# Altium PCB CTS.PcbDoc
Units mil, origin at the board's own origin, x right, y up, seen from the top; angles counter-clockwise.
Board outline 5100 x 4000 mil, 2 copper layers (Top Layer, Bottom Layer), stack 60.433 mil thick; 50 components, 39 nets, 166 pads, 93 vias.
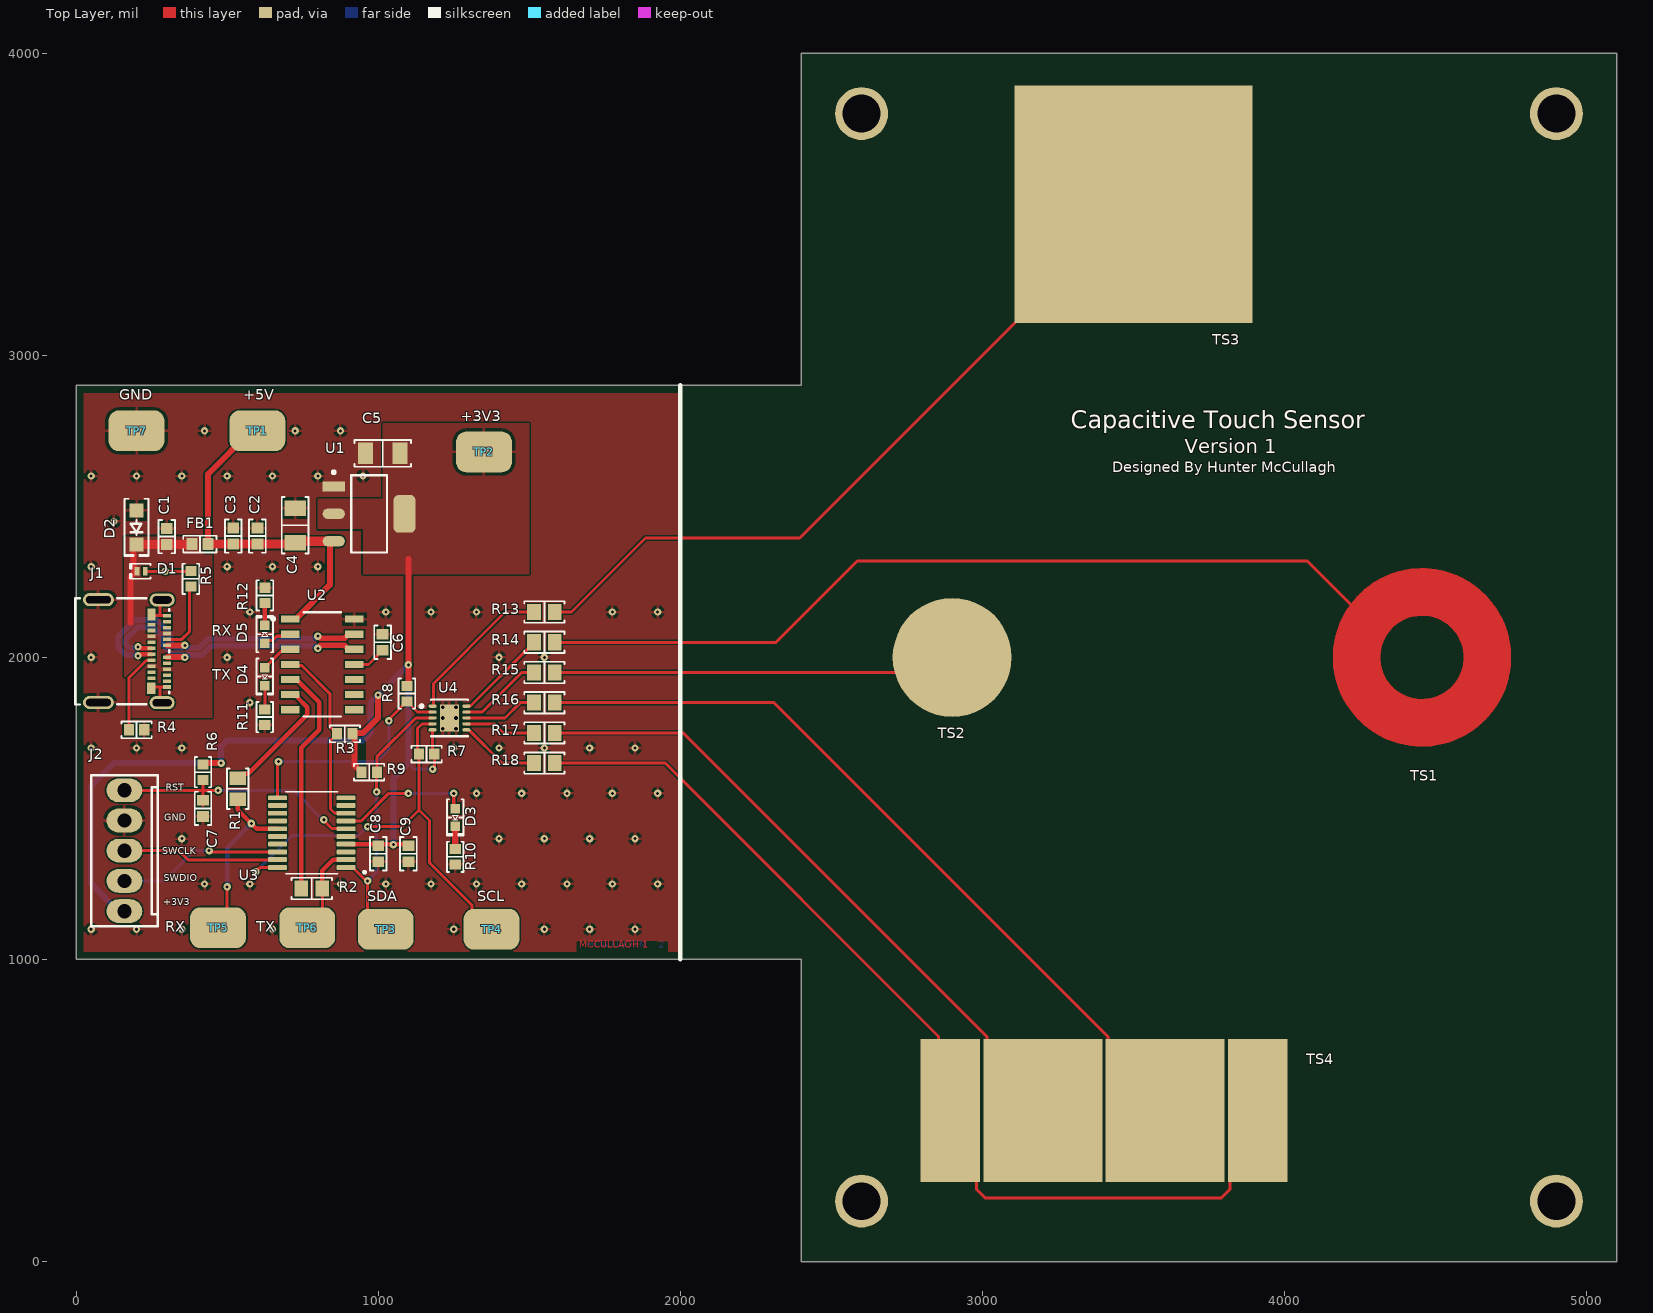
[diagram p0: Top Layer view]
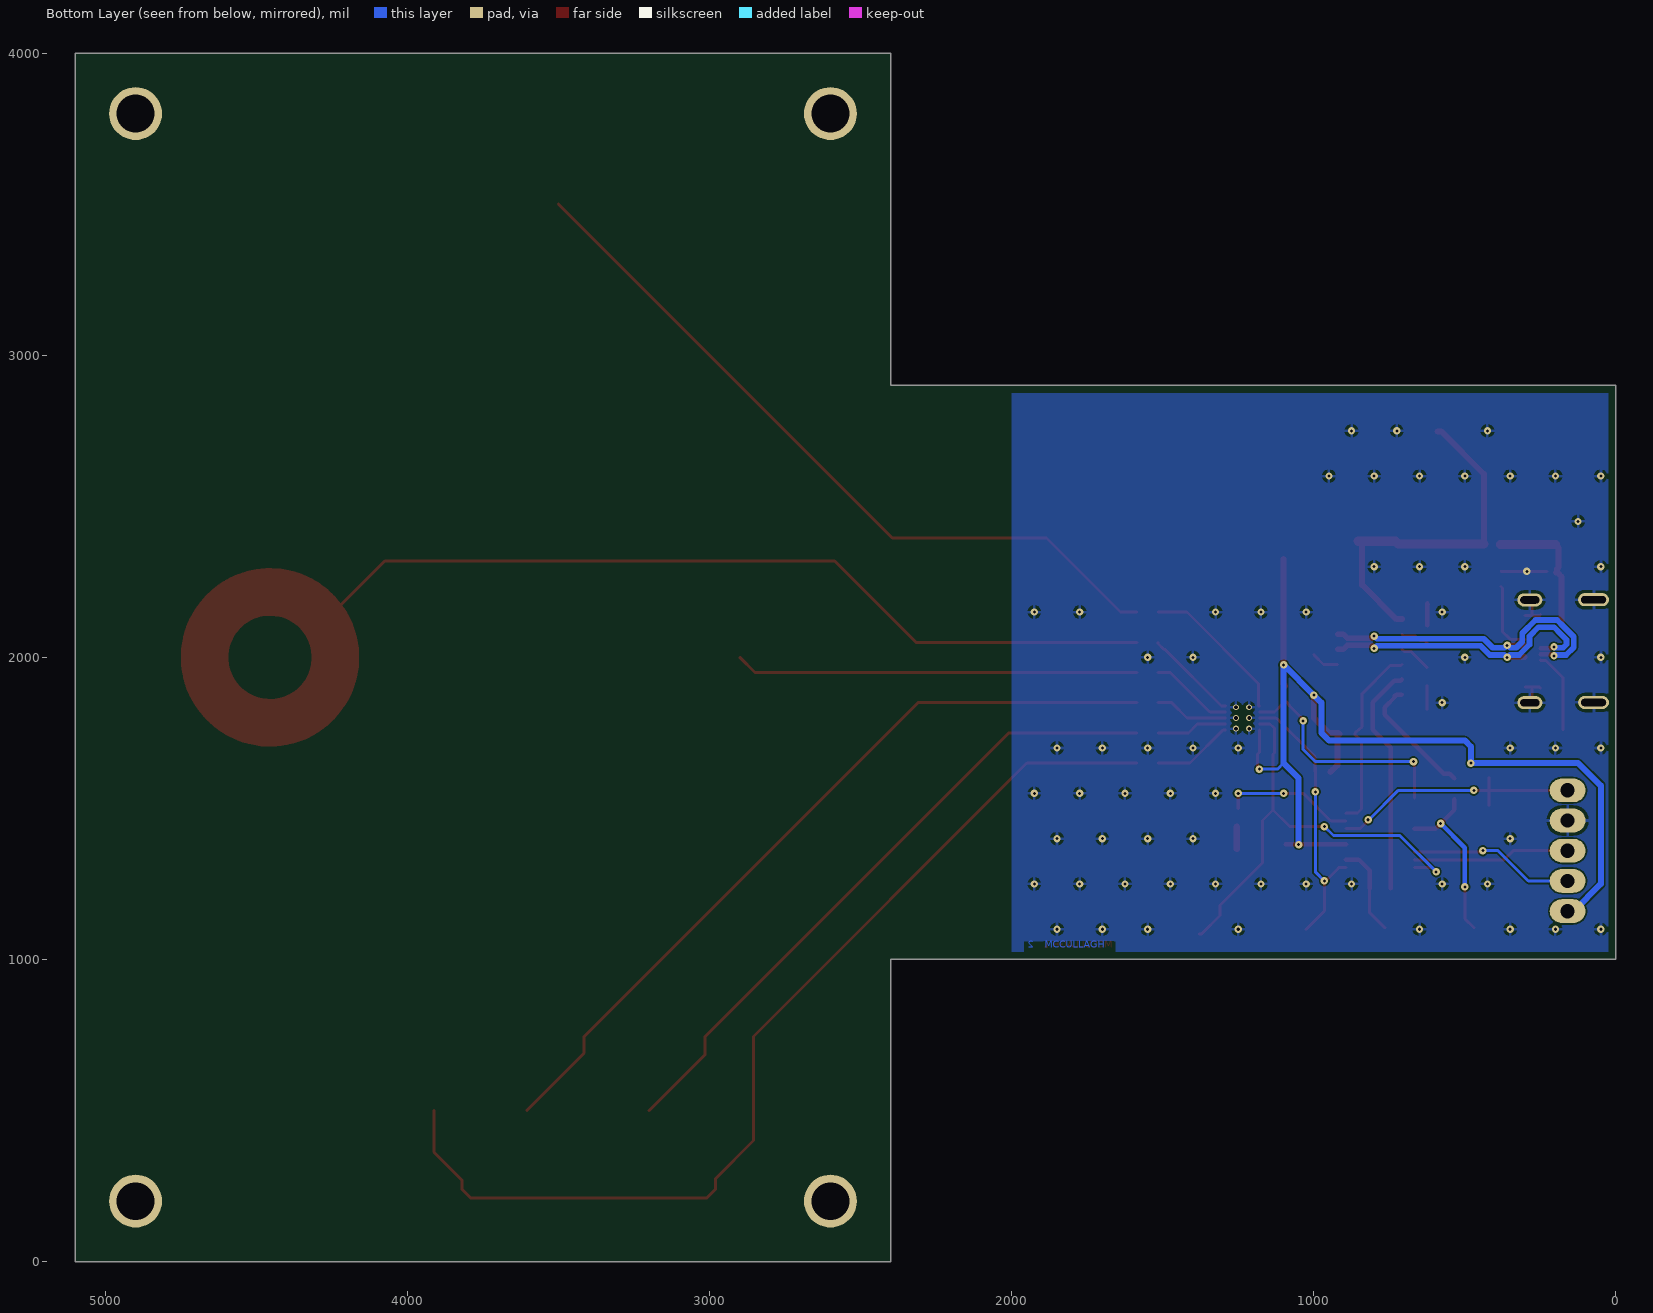
[diagram p1: Bottom Layer view, seen from below]
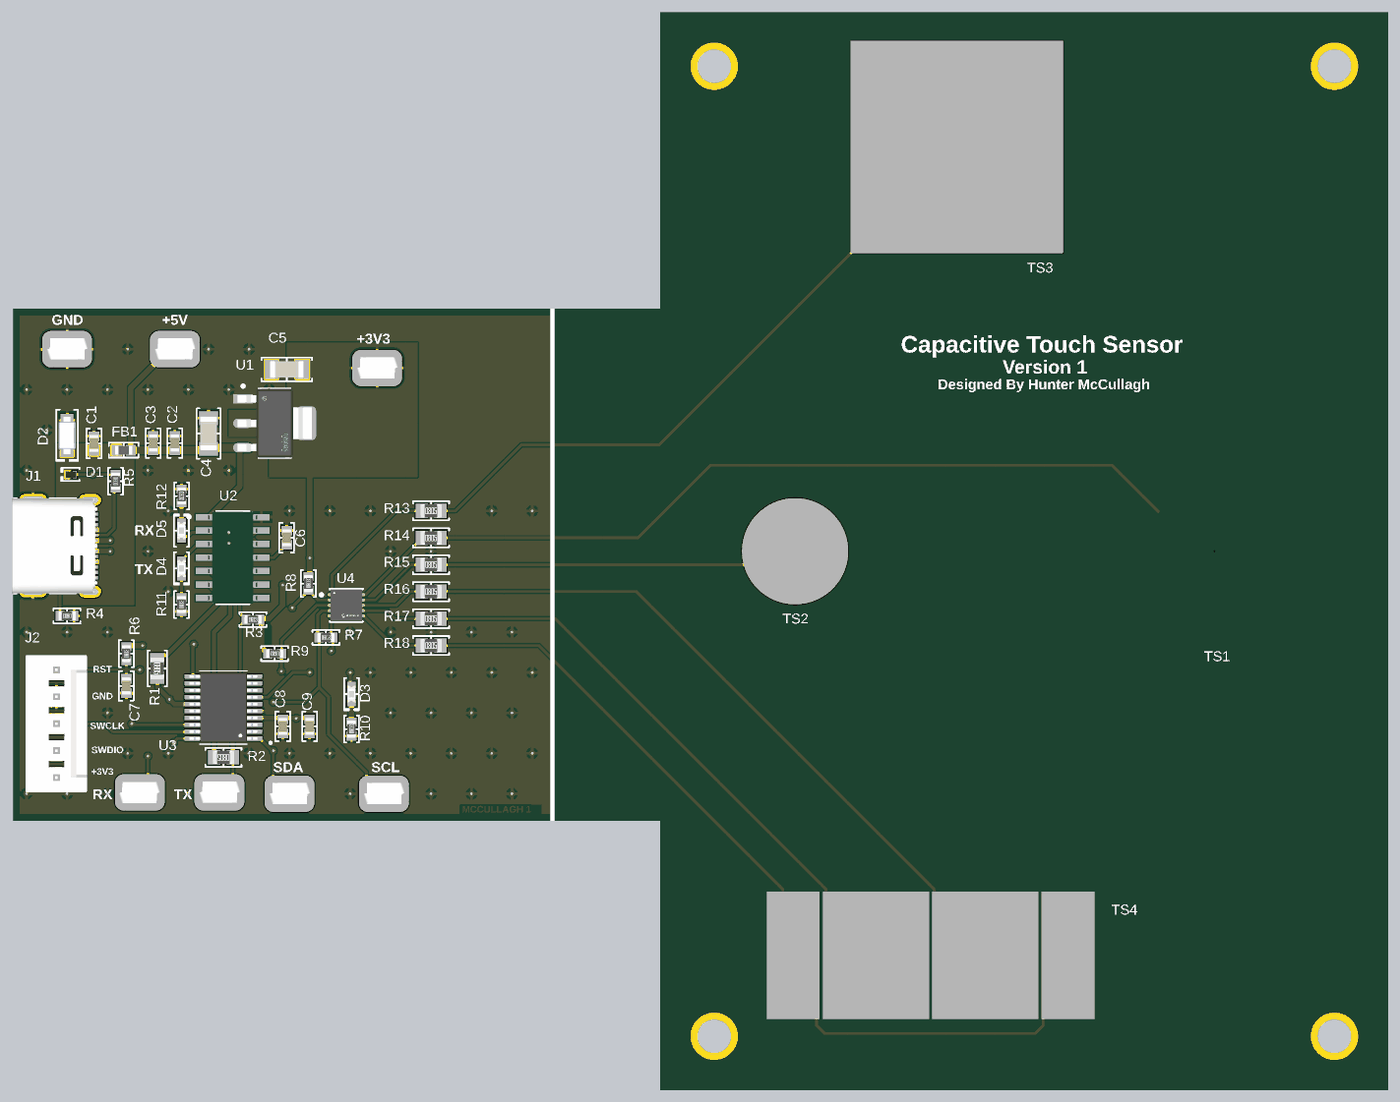
[diagram p2: 3D render of the assembled board from above, using the file's embedded part models]

## Layer stack, top to bottom
Top Solder: solder mask 0.4, Solder Resist, Dk 3.5
Top Layer: signal copper 0.689
Dielectric 1: prepreg 59.055, FR-4, Dk 4.8
Bottom Layer: signal copper 0.689
Board Layer Stack Bottom Solder: solder mask 0.4, Solder Resist, Dk 3.5

## Board outline
0,1000 0,2900 2400,2900 2400,4000 5100,4000 5100,0 2400,0 2400,1000

## Design rules (kind name [scope] priority, off if disabled: settings)
Clearance [All] p1: gap=5 ignorepadtopadclearanceinfootprint=FALSE
DiffPairsRouting "Schematic Differential Pairs Routing_3" [InNet('d_p')] p1: maxlimit=5 minlimit=5 mostfreqgap=5 toplayer_minwidth=18.8 toplayer_maxwidth=18.8 toplayer_prefwidth=18.8 bottomlayer_minwidth=18.8 bottomlayer_maxwidth=18.8 bottomlayer_prefwidth=18.8 impedanceprofiledriven=TRUE impedanceprofileid={8F36BA3C-3174-417B-8D45-3B1AD9F81AAA} impedanceprofilevalue=90.000000 maxuncoupledlength=500
DiffPairsRouting "Schematic Differential Pairs Routing_2" [InNet('d_n')] p2: maxlimit=5 minlimit=5 mostfreqgap=5 toplayer_minwidth=18.8 toplayer_maxwidth=18.8 toplayer_prefwidth=18.8 bottomlayer_minwidth=18.8 bottomlayer_maxwidth=18.8 bottomlayer_prefwidth=18.8 impedanceprofiledriven=TRUE impedanceprofileid={8F36BA3C-3174-417B-8D45-3B1AD9F81AAA} impedanceprofilevalue=90.000000 maxuncoupledlength=500
DiffPairsRouting [All] p3: maxlimit=10 minlimit=10 mostfreqgap=10 toplayer_minwidth=15 toplayer_maxwidth=15 toplayer_prefwidth=15 bottomlayer_minwidth=15 bottomlayer_maxwidth=15 bottomlayer_prefwidth=15 maxuncoupledlength=500
HoleSize [All] p1: absolutevalues=TRUE maxlimit=1000 minlimit=1 maxpercent=80.000 minpercent=20.000
MinimumSolderMaskSliver [All] p1: minsoldermaskwidth=1
PolygonConnect PolygonConnect_1 [All vs InNet('+VUSB')] p1: connectstyle=Direct reliefconductorwidth=10 reliefentries=4 polygonreliefangle="90 Angle" airgapwidth=10
PolygonConnect [All] p2: connectstyle=Relief reliefconductorwidth=10 reliefentries=4 polygonreliefangle="90 Angle" airgapwidth=10
RoutingVias [All] p1: holewidth=28 width=50 viastyle="Through Hole" minholewidth=28 minwidth=50 maxholewidth=28 maxwidth=50
SilkToSilkClearance [All] p1: silktosilkclearance=1
SilkToSolderMaskClearance [IsPad] p1: minsilkscreentomaskgap=1 clearancetoexposedcopper=TRUE
SolderMaskExpansion [All] p1: expansion=4 istentingtop=FALSE
SupplyNets "Schematic Supply Nets_3" [InNet('GND')] p1: voltage=0.000
SupplyNets "Schematic Supply Nets_2" [InNet('+5V')] p2: voltage=0.000
SupplyNets "Schematic Supply Nets_1" [InNet('+VUSB')] p3: voltage=0.000
SupplyNets "Schematic Supply Nets" [InNet('+3V3')] p4: voltage=0.000
Width [All] p1: maxlimit=120 minlimit=5 preferedwidth=10
25 further rules are at their usual default settings.

## Classes and differential pairs
differential pair d: +d_p -d_n

## Components (designator, comment, footprint, x,y, rotation, side; value= is the part's Value field where it differs from the comment)
C1 "0.1 µF" "CAP 0603_1608" 300,2400 r270 top
C2 "0.1 µF" "CAP 0603_1608" 600,2401.57 r270 top
C3 "1µF" "CAP 0603_1608" 520,2401.57 r270 top
C4 "10 µF" "CAP 1206_3216 - 0.8MM" 725,2437.09 r270 top
C5 "22 µF" "CAP 1206_3216 - 0.8MM" 1015,2675 r0 top
C6 "0.47 µF" "CAP 0603_1608" 1014.52,2050.13 r270 top
C7 "0.1 µF" "CAP 0603_1608" 420,1500 r90 top
C8 "0.1 µF" "CAP 0603_1608" 1000,1350 r90 top
C9 "1µF" "CAP 0603_1608" 1100,1350 r90 top
D1 "TPD1E05U06DPYT" 0402 215,2285 r180 top
D2 "DSS12UTR" SOD123F 200,2430 r270 top
D3 "Green" "LED 0603_1608 GREEN" 1255,1470 r270 top
D4 "Green" "LED 0603_1608 GREEN" 624.52,1936.23 r270 top
D5 "Green" "LED 0603_1608 GREEN" 624.52,2076.7 r90 top
FB1 "120 Ohms @ 100 MHz" "FER 0603_1608" 410,2375 r0 top
J1 "1054500101" "Molex 1054500101" 275,2020 r270 top
J2 "0022272051" "MOLEX KK 0022272051" 160,1360 r90 top
R1 "0Ω" "RES 0805_2012" 535,1565 r270 top value="0 Ohms"
R2 "0Ω" "RES 0805_2012" 780,1235 r180 top value="0 Ohms"
R3 "10kΩ" "RES 0603_1608" 889.52,1746.7 r0 top value="10 kOhms"
R4 "5.1kΩ" "RES 0603_1608" 200,1760 r180 top value="5.1 Ohms"
R5 "5.1kΩ" "RES 0603_1608" 380,2260 r270 top value="5.1 Ohms"
R6 "10kΩ" "RES 0603_1608" 420,1620 r90 top value="10 kOhms"
R7 "10kΩ" "RES 0603_1608" 1160,1680 r0 top value="10 kOhms"
R8 "10kΩ" "RES 0603_1608" 1095,1880 r90 top value="10 kOhms"
R9 "10kΩ" "RES 0603_1608" 970,1620 r180 top value="10 kOhms"
R10 "1kΩ" "RES 0603_1608" 1255,1340 r90 top value="1 kOhms"
R11 "1kΩ" "RES 0603_1608" 624.52,1802.29 r90 top value="1 kOhms"
R12 "1kΩ" "RES 0603_1608" 625,2205 r270 top value="1 kOhms"
R13 "0Ω" "RES 0805_2012" 1550,2150 r0 top value="0 Ohms"
R14 "0Ω" "RES 0805_2012" 1550,2050 r0 top value="0 Ohms"
R15 "0Ω" "RES 0805_2012" 1550,1950 r0 top value="0 Ohms"
R16 "0Ω" "RES 0805_2012" 1550,1850 r0 top value="0 Ohms"
R17 "0Ω" "RES 0805_2012" 1550,1750 r0 top value="0 Ohms"
R18 "0Ω" "RES 0805_2012" 1550,1650 r0 top value="0 Ohms"
TP1 "Test Point" Compact 600,2750 r0 top
TP2 "Test Point" Compact 1350,2680 r0 top
TP3 "Test Point" Compact 1025,1100 r0 top
TP4 "Test Point" Compact 1375,1100 r0 top
TP5 "Test Point" Compact 470,1105 r180 top
TP6 "Test Point" Compact 765,1105 r0 top
TP7 "Test Point" Compact 200,2750 r0 top
TS1 "Donut Touch Sensor" "DONUT TOUCH SENSOR" 4455,2000 r180 top
TS2 "Circle Touch Sensor" "CIRCLE TOUCH SENSOR" 2900,2000 r180 top
TS3 "Square Button" "Square Touch Sensor" 3500,3500 r180 top
TS4 "Q Slide Touch Sensor (3 Channel)" "Q TOUCH SLIDE SENSOR" 3215,500 r0 top
U1 "AZ1117IH-3.3TRG1" FP-SOT223-IPC_B 970,2475 r0 top
U2 "MCP2221A-I/SL" FP-C04-065-SL-MFG 814.52,1976.7 r0 top
U3 "STM32C011F4P6TR" SOP65P640X120-20N 780,1420 r180 top
U4 "CAP1206-1-AIA-TR" FP-10DFN-162304-3x3B-MFG 1235.91,1799.37 r0 top

## Footprints (in the part's own frame and the unit in brackets; to place one, negate y for a bottom-side part, rotate by r counter-clockwise, add the part's x,y. Pads: shape width x height; smd on the part's side, far side on the other; paste and mask are expansions set on the pad)
0402 [mm] "SODFL, 2-Leads, Body 0.675x1.075mm, IPC Medium Density"
  rect 0.4x0.7 smd: 1(-0.35,0) 2(0.35,0)
  silkscreen extent -0.8,-0.63 0.92,0.63, body extent -0.51,-0.31 0.5,0.3, height 0.45
"CAP 0603_1608" [mm] "Chip Capacitor, 2-Leads, Body 1.60x0.80mm, IPC Medium Density"
  rect 0.9x1 smd: 1(-0.675,0) 2(0.675,0)
  silkscreen extent -1.4,-0.7 1.4,0.7, body extent -0.8,-0.41 0.8,0.41, height 0.82
"CAP 1206_3216 - 0.8MM" [mm] "Chip Capacitor, 2-Leads, Body 3.25x1.60mm, IPC Medium Density"
  rect 1.3x1.8 smd: 1(-1.45,0) 2(1.45,0)
  silkscreen extent -2.37,-1.12 2.37,1.12, body extent -1.6,-0.8 1.6,0.8, height 0.8
"CIRCLE TOUCH SENSOR" [mm]
  round 10 smd: 1(0,0)
Compact [mil] "Surface Mount Test-Point"
  rrect50% 185x135 smd: 1(0,0)
  body extent -86,-73 88,75, height 91
"DONUT TOUCH SENSOR" [mil]
  round 0 smd: 1(0,0)
  Top Layer circle w157.48: c0,0 r216.54
"FER 0603_1608" [mm] "Chip Ferrite, 2-Leads, Body 1.60x0.80mm, IPC Medium Density"
  rect 0.9x1 smd: 1(-0.675,0) 2(0.675,0)
  silkscreen extent -1.4,-0.7 1.4,0.7, body extent -0.8,-0.41 0.8,0.41, height 0.82
FP-10DFN-162304-3x3B-MFG [mm]
  rrect100% 0.69x0.28 smd paste-1000 mask+0: 1(-1.42,1) 2(-1.42,0.5) 3(-1.42,0) 4(-1.42,-0.5) 5(-1.42,-1) 6(1.42,-1) 7(1.42,-0.5) 8(1.42,0) 9(1.42,0.5) 10(1.42,1)
  rect 1.6x2.3 smd paste-1000 mask+0: 11(0,0)
  silkscreen extent -2.47,-1.55 1.55,1.55, body extent -1.87,-1.65 1.87,1.65, height 0.25
FP-C04-065-SL-MFG [mm]
  rect 1.55x0.6 smd paste+0 mask+0: 1(-2.7,3.81) 2(-2.7,2.54) 3(-2.7,1.27) 4(-2.7,0) 5(-2.7,-1.27) 6(-2.7,-2.54) 7(-2.7,-3.81) 8(2.7,-3.81) 9(2.7,-2.54) 10(2.7,-1.27) 11(2.7,0) 12(2.7,1.27) 13(2.7,2.54) 14(2.7,3.81)
  silkscreen extent -4.25,-4.38 1.55,4.38, body extent -3.57,-4.62 3.57,4.62, height 0.25
FP-SOT223-IPC_B [mm]
  rect 1.86x0.872 smd paste+0 mask+0: 1(-2.976,2.3)
  rrect100% 1.86x0.872 smd paste+0 mask+0: 2(-2.976,0) 3(-2.976,-2.3)
  rrect47% 1.86x3.172 smd paste+0 mask+0: 4(2.976,0)
  silkscreen extent -3.1,-3.25 1.5,3.62, body extent -4.16,-3.5 4.16,3.5, height 0.25
"LED 0603_1608 GREEN" [mm] "Chip Diode, 2-Leads, Body 1.60x0.80mm, IPC Medium Density"
  rect 0.8x0.8 smd: 1(-0.75,0) 2(0.75,0)
  silkscreen extent -1.52,-0.7 1.52,0.7, body extent -0.8,-0.4 0.8,0.4, height 0.53
"Molex 1054500101" [mm] "USB-C Receptacle Connector 24 Position Surface Mount, 24 Position, Body 8.94x7.90mm"
  rect 0.3x0.7 smd: A1(-3,0.655) A2(-2.5,0.655) A3(-2,0.655) A4(-1.5,0.655) A5(-1,0.655) A6(-0.5,0.655) A7(0.5,0.655) A8(1,0.655) A9(1.5,0.655) A10(2,0.655) A11(2.5,0.655) A12(3,0.655) B2(2.25,-0.645) B3(1.75,-0.645) B4(1.25,-0.645) B5(0.75,-0.645) B6(0.25,-0.645) B7(-0.25,-0.645) B8(-0.75,-0.645) B9(-1.25,-0.645) B10(-1.75,-0.645) B11(-2.25,-0.645)
  rect 1x0.7 smd: B1(3.1,-0.655) B12(-3.1,-0.645)
  oval 1.1x2.6 hole 2.1 slot 0.6 at 0 deg: S(-4.34,-5.105) S(4.3,-5.105)
  oval 1.1x2.1 hole 1.6 slot 0.6 at 0 deg: S(-4.32,0.245) S(4.32,0.245)
  silkscreen extent -4.47,-7.07 4.47,0.83, body extent -4.47,-7.06 4.47,0.84, height 3.21
"MOLEX KK 0022272051" [mm]
  oval 2x3 hole 1.2: 1(-5.08,0) 2(-2.54,0) 3(0,0) 4(2.54,0) 5(5.08,0)
  silkscreen extent -6.35,-2.79 6.35,2.79, body extent -6.35,-2.9 6.35,2.9, height 11.7
"Q TOUCH SLIDE SENSOR" [mm]
  rect 5x12 smd mask+0.025: 1(-8.179,0) 1(17.704,0)
  rect 10x12 smd mask+0.025: 2(-0.381,0) 3(9.906,0)
"RES 0603_1608" [mm] "Chip Resistor, 2-Leads, Body 1.60x0.80mm, IPC Medium Density"
  rect 0.85x0.95 smd: 1(-0.65,0) 2(0.65,0)
  silkscreen extent -1.27,-0.7 1.27,0.7, body extent -0.8,-0.4 0.8,0.4, height 0.45
"RES 0805_2012" [mm] "Chip Resistor, 2-Leads, Body 2.00x1.25mm, IPC Medium Density"
  rect 1.15x1.35 smd: 1(-0.875,0) 2(0.875,0)
  silkscreen extent -1.7,-0.9 1.7,0.9, body extent -1,-0.62 1,0.63, height 0.6
SOD123F [mm] "SODFL, 2-Leads, Body 1.60x3.50mm, IPC Medium Density"
  rect 1.2x1.2 smd: 1(-1.43,0) 2(1.43,0)
  silkscreen extent -2.41,-1.02 2.41,1.02, body extent -1.75,-0.8 1.75,0.8, height 1.1
SOP65P640X120-20N [mm]
  rrect25% 1.56x0.41 smd: 1(-2.88,2.925) 2(-2.88,2.275) 3(-2.88,1.625) 4(-2.88,0.975) 5(-2.88,0.325) 6(-2.88,-0.325) 7(-2.88,-0.975) 8(-2.88,-1.625) 9(-2.88,-2.275) 10(-2.88,-2.925) 11(2.88,-2.925) 12(2.88,-2.275) 13(2.88,-1.625) 14(2.88,-0.975) 15(2.88,-0.325) 16(2.88,0.325) 17(2.88,0.975) 18(2.88,1.625) 19(2.88,2.275) 20(2.88,2.925)
  silkscreen extent -4.54,-3.45 2.2,3.45, body extent -3.2,-3.25 3.2,3.25, height 1.2
"Square Touch Sensor" [mm]
  rect 20x20 smd: 1(0,0)

## Part data
C1 C2 C7 C8: library part C0603C104K5RAC7411, "CAP CER 0.1UF 50V X7R 0603", Device Package="0603 (1608 Metric)", Manufacturer=KEMET, Operating Temperature="-55°C ~ 125°C", Supplier Part Number 1=399-C0603C104K5RAC7411CT-ND, Temperature Coefficient=X7R, Tolerance=±10%, Voltage - Rated=50V, Applications="Bypass, Decoupling", Capacitance="0.1 µF", ComponentLink1Description=Datasheet, ComponentLink1URL=https://api.kemet.com/component-edge/download/datasheet/C0603C104K5RAC7411.pdf, ComponentLink2Description="DigiKey Link", ComponentLink2URL=https://www.digikey.com/en/products/detail/kemet/C0603C104K5RAC7411/3317013, LastUpdated="2026-04-06 7:23:52 PM", Lifecycle Status=Active, Minimum Order=1, Mounting Type="Surface Mount, MLCC", Package / Case="0603 (1608 Metric)", Packaging=TapeAndReel, Part Number=C0603C104K5RAC7411, Part Status=Active, PartId=2233, Price=0.01, Series="SMD Comm X7R", Size / Dimension="0.063\" L x 0.031\" W (1.60mm x 0.80mm)", Supplier 1=DigiKey, Thickness (Max)="0.035\" (0.90mm)"
C3 C9: library part 06033D105MAT2A, "CAP CER 1UF 25V X5R 0603", Device Package="0603 (1608 Metric)", Manufacturer="AVX Corporation", Operating Temperature="-55°C ~ 85°C", Supplier Part Number 1=478-4531-1-ND, Temperature Coefficient=X5R, Tolerance=±20%, Voltage - Rated=25V, Applications="General Purpose", Capacitance=1µF, ComponentLink1Description=Datasheet, ComponentLink1URL=http://datasheets.avx.com/cx5r.pdf, ComponentLink2Description="DigiKey Link", ComponentLink2URL=http://digikey.com/product-detail/en/avx-corporation/06033D105MAT2A/478-4531-1-ND/1645882, LastUpdated="2020-09-02 1:03:35 AM", Lifecycle Status=Active, Minimum Order=1, Mounting Type="Surface Mount, MLCC", Package / Case="0603 (1608 Metric)", Packaging=TapeAndReel, Part Number=06033D105MAT2A, Part Status=Active, PartId=2656, Price=0.11, Series=-, Size / Dimension="0.063\" L x 0.032\" W (1.60mm x 0.81mm)", Supplier 1=DigiKey, Thickness (Max)="0.035\" (0.90mm)"
C4: library part GRM31CR71E106KA12K, "CAP CER 10UF 25V X7R 1206", Device Package="1206 (3216 Metric)", Manufacturer="Murata Electronics", Operating Temperature="-55°C ~ 125°C", Supplier Part Number 1=490-14678-1-ND, Temperature Coefficient=X7R, Tolerance=±10%, Voltage - Rated=25V, Applications="General Purpose", Capacitance="10 µF", ComponentLink1Description=Datasheet, ComponentLink1URL=https://search.murata.co.jp/Ceramy/image/img/A01X/G101/ENG/GRM31CR71E106KA12-01.pdf, ComponentLink2Description="DigiKey Link", ComponentLink2URL=https://www.digikey.com/en/products/detail/murata-electronics/GRM31CR71E106KA12K/4905618, LastUpdated="2026-04-06 7:38:01 PM", Lifecycle Status=Active, Minimum Order=1, Mounting Type="Surface Mount, MLCC", Package / Case="1206 (3216 Metric)", Packaging=TapeAndReel, Part Number=GRM31CR71E106KA12K, Part Status=Active, PartId=19493, Price=0.07, Series=GRM, Size / Dimension="0.126\" L x 0.063\" W (3.20mm x 1.60mm)", Supplier 1=DigiKey, Thickness (Max)="0.071\" (1.80mm)"
C5: library part CL31A226KOCLFNC, "CAP CER 22UF 16V X5R 1206", Device Package="1206 (3216 Metric)", Manufacturer="Samsung Electro-Mechanics", Operating Temperature="-55°C ~ 85°C", Supplier Part Number 1=1276-2725-1-ND, Temperature Coefficient=X5R, Tolerance=±10%, Voltage - Rated=16V, Applications="General Purpose", Capacitance="22 µF", ComponentLink1Description=Datasheet, ComponentLink1URL=http://www.samsungsem.com/kr/support/product-search/mlcc/CL31A226KOCLFNC.jsp, ComponentLink2Description="DigiKey Link", ComponentLink2URL=https://www.digikey.com/en/products/detail/samsung-electro-mechanics/CL31A226KOCLFNC/3888383, LastUpdated="2026-04-06 7:38:00 PM", Lifecycle Status=Active, Minimum Order=1, Mounting Type="Surface Mount, MLCC", Package / Case="1206 (3216 Metric)", Packaging=TapeAndReel, Part Number=CL31A226KOCLFNC, Part Status=Active, PartId=18940, Price=0.09, Series=CL, Size / Dimension="0.126\" L x 0.063\" W (3.20mm x 1.60mm)", Supplier 1=DigiKey, Thickness (Max)="0.037\" (0.95mm)"
C6: library part GMC10X7R474J25NT, "CAP0603 X7R .47UF 5% 25V", Device Package="0603 (1608 Metric)", Manufacturer="Cal-Chip Electronics, Inc.", Operating Temperature="-55°C ~ 125°C", Supplier Part Number 1=4713-GMC10X7R474J25NTCT-ND, Temperature Coefficient=X7R, Tolerance=±5%, Voltage - Rated=25V, Applications="General Purpose", Capacitance="0.47 µF", ComponentLink1Description=Datasheet, ComponentLink1URL=https://calchip.com/wp-content/uploads/2024/02/gmc_series-1.pdf, ComponentLink2Description="DigiKey Link", ComponentLink2URL=https://www.digikey.com/en/products/detail/cal-chip-electronics-inc/GMC10X7R474J25NT/25573329, LastUpdated="2026-04-06 7:17:50 PM", Lifecycle Status=Active, Minimum Order=1, Mounting Type="Surface Mount, MLCC", Package / Case="0603 (1608 Metric)", Packaging=TapeAndReel, Part Number=GMC10X7R474J25NT, PartId=65729, Price=0.02, Series=GMC, Size / Dimension="0.063\" L x 0.031\" W (1.60mm x 0.80mm)", Supplier 1=DigiKey, Thickness (Max)="0.037\" (0.95mm)"
D1: "TVS DIODE 5.5VWM 14VC 2X1SON", Current - Peak Pulse (10/1000µs)="2.5A (8/20µs)", Device Package="0402 (1005 Metric)", Manufacturer="Texas Instruments", Operating Temperature="-40°C ~ 125°C (TA)", Power - Peak Pulse=40W, Power Line Protection=Yes, Supplier Device Package="2-X1SON (1x.60)", Supplier Part Number 1=296-39342-1-ND, Voltage - Breakdown (Min)=6.5V, Voltage - Clamping (Max) @ Ipp=14V, Voltage - Reverse Standoff (Typ)="5.5V (Max)", Applications=HDMI, ComponentLink1Description=Datasheet, ComponentLink1URL=http://www.ti.com/general/docs/suppproductinfo.tsp?distId=10&gotoUrl=http%3A%2F%2Fwww.ti.com%2Flit%2Fgpn%2Ftpd1e05u06, ComponentLink2Description="DigiKey Link", ComponentLink2URL=https://www.digikey.com/en/products/detail/texas-instruments/TPD1E05U06DPYT/3902056, LastUpdated="2026-04-05 9:01:42 PM", Lifecycle Status=Active, Minimum Order=1, Mounting Type="Surface Mount", Package / Case="0402 (1005 Metric)", Packaging=TapeAndReel, Part Number=TPD1E05U06DPYT, Part Status=Active, PartId=10366, Price=0.32, Series=-, Supplier 1=DigiKey, Type=Zener, Unidirectional Channels=1
D2: "SCHOTTKY 20V SOD-123FL", Capacitance @ Vr, F="110pF @ 4V, 1MHz", Current - Average Rectified (Io)=1A, Current - Reverse Leakage @ Vr="100 µA @ 20 V", Manufacturer="SMC Diode Solutions", Operating Temperature - Junction="-55°C ~ 150°C", Package / Case=SOD-123F, Supplier Device Package=SOD-123FL, Supplier Part Number 1=1655-1925-1-ND, Voltage - DC Reverse (Vr) (Max)="20 V", Voltage - Forward (Vf) (Max) @ If="500 mV @ 1 A", ComponentLink1Description=Datasheet, ComponentLink1URL=http://www.smc-diodes.com/propdf/DSS12U%20THRU%20DSS125U%20N1873%20REV.A.pdf, ComponentLink2Description="DigiKey Link", ComponentLink2URL=https://www.digikey.com/en/products/detail/smc-diode-solutions/DSS12UTR/8341857, Diode Type=Schottky, LastUpdated="2026-04-05 8:31:53 PM", Lifecycle Status=Active, Minimum Order=1, Mounting Type="Surface Mount", Packaging=TapeAndReel, Part Number=DSS12UTR, Part Status=Active, PartId=2514, Price=0.03, Series=-, Speed="Fast Recovery =< 500ns, > 200mA (Io)", Supplier 1=DigiKey
D3 D4 D5: library part VLMTG1400-GS08, "LED GREEN 0603 SMD", Current - Test=20mA, Device Package="0603 (1608 Metric)", Lens Color=0.65mm, Manufacturer="Vishay Semiconductor Opto Division", Millicandela Rating=1400mcd, Supplier Device Package=0603, Supplier Part Number 1=VLMTG1400-GS08CT-ND, Voltage - Forward (Vf) (Typ)=2.85V, Color=Green, ComponentLink1Description=Datasheet, ComponentLink1URL=http://www.vishay.com/docs/84393/vlmtg1400.pdf, ComponentLink2Description="DigiKey Link", ComponentLink2URL=https://www.digikey.com/en/products/detail/vishay-semiconductor-opto-division/VLMTG1400-GS08/7597661, Configuration=Standard, Height (Max)=0.65mm, LastUpdated="2026-04-05 8:36:38 PM", Lens Size="1.10mm x 0.80mm", Lens Style="Rectangle with Flat Top", Lifecycle Status=Active, Minimum Order=1, Mounting Type="Surface Mount", Package / Case="0603 (1608 Metric)", Packaging=TapeAndReel, Part Number=VLMTG1400-GS08, Part Status=Active, PartId=606, Price=0.10, Series=CHIPLED, Size / Dimension="1.60mm L x 0.80mm W", Supplier 1=DigiKey, Viewing Angle=146°, Wavelength - Dominant=525nm, Wavelength - Peak=518nm
FB1: library part BLM18BD121BH1D, "FERRITE BEAD 120 OHM 0603 1LN", Current Rating (Max)=300mA, DC Resistance (DCR) (Max)=400mOhm, Device Package="0603 (1608 Metric)", Manufacturer="Murata Electronics", Operating Temperature="-55°C ~ 150°C", Ratings=AEC-Q200, Supplier Part Number 1=490-14041-1-ND, ComponentLink1Description=Datasheet, ComponentLink1URL=https://www.murata.com/en-us/products/productdata/8798137286686/QNFA9129.pdf, ComponentLink2Description="DigiKey Link", ComponentLink2URL=https://www.digikey.com/en/products/detail/murata-electronics/BLM18BD121BH1D/6156012, Filter Type="Power Line", Height (Max)="0.037\" (0.95mm)", Impedance @ Frequency="120 Ohms @ 100 MHz", LastUpdated="2026-04-05 8:28:12 PM", Lifecycle Status=Active, Minimum Order=1, Mounting Type="Surface Mount", Number of Lines=1, Package / Case="0603 (1608 Metric)", Packaging=TapeAndReel, Part Number=BLM18BD121BH1D, Part Status=Active, PartId=562, Price=0.03, Series="EMIFIL®, BLM18", Size / Dimension="0.063\" L x 0.031\" W (1.60mm x 0.80mm)", Supplier 1=DigiKey
J1: "CONN RCP USB3.1 TYPEC 24P SMD RA", Current Rating (Amps)="0.25A, 1A, 5A", Manufacturer=Molex, Operating Temperature="-30°C ~ 85°C", Supplier Part Number 1=WM12856CT-ND, Voltage - Rated=30VAC/DC, ComponentLink1Description=Datasheet, ComponentLink1URL=https://www.molex.com/pdm_docs/ps/PS-105448-001.pdf, ComponentLink2Description="DigiKey Link", ComponentLink2URL=http://digikey.com/product-detail/en/molex/1054500101/WM12856CT-ND/5843891, Connector Type="USB - C (Type - C)", Gender=Receptacle, LastUpdated="2020-06-06 2:14:04 AM", Lifecycle Status=Active, Mating Cycles=10000, Minimum Order=1, Mounting Feature=Horizontal, Mounting Type="Surface Mount, Right Angle; Through Hole", Number of Contacts=24, Number of Ports=1, Packaging=TapeAndReel, Part Number=1054500101, Part Status=Active, Price=1.22, Series=105445, Shielding=Shielded, Specifications="USB 3.1 (USB 3.1 Gen 2, Superspeed+)", Supplier 1=DigiKey, Termination=Solder
J2: "CONN HEADER VERT 5POS 2.54MM", Insulation Color=Natural, Manufacturer=Molex, Material Flammability Rating="UL94 V-0", Supplier Part Number 1=WM4114-ND, ComponentLink1Description=Datasheet, ComponentLink1URL=https://www.molex.com/pdm_docs/sd/022272051_sd.pdf, ComponentLink2Description="DigiKey Link", ComponentLink2URL=http://digikey.com/product-detail/en/molex/0022272051/WM4114-ND/1130580, Connector Type=Header, Contact Finish - Mating=Tin, Contact Finish - Post=Tin, Contact Finish Thickness - Mating="100.0µin (2.54µm)", Contact Length - Mating="0.295\" (7.49mm)", Contact Length - Post="0.140\" (3.56mm)", Contact Material=Brass, Contact Shape=Square, Contact Type="Male Pin", Fastening Type="Friction Lock", Insulation Height="0.461\" (11.70mm)", Insulation Material="Polyamide (PA), Nylon", LastUpdated="2020-01-12 11:52:16 PM", Lifecycle Status=Active, Minimum Order=1, Mounting Type="Through Hole", Number of Positions=5, Number of Positions Loaded=All, Number of Rows=1, Overall Contact Length="0.560\" (14.22mm)", Packaging=Bulk, Part Number=0022272051, Part Status=Active, PartId=79, Pitch - Mating="0.100\" (2.54mm)", Price=0.46, Series="KK 6410", Shrouding="Shrouded - 1 Wall", Style="Board to Cable/Wire", Supplier 1=DigiKey, Termination=Solder
R1 R2 R13 R14 R15 R16 R17 R18: library part TLRZ2ATTD, "RES 0 OHM JUMPER 0805", Device Package="0805 (2012 Metric)", Manufacturer="KOA Speer Electronics, Inc.", Operating Temperature="-65°C ~ 170°C", Ratings=AEC-Q200, Resistance="0 Ohms", Supplier Device Package=0805, Supplier Part Number 1=2019-TLRZ2ATTDCT-ND, Tolerance=Jumper, ComponentLink1Description=Datasheet, ComponentLink1URL=http://www.koaspeer.com/catimages/Products/TLRZ/TLRZ.pdf, ComponentLink2Description="DigiKey Link", ComponentLink2URL=https://www.digikey.com/en/products/detail/koa-speer-electronics-inc/TLRZ2ATTD/9845494, Composition="Metal Element", Features="Automotive AEC-Q200, Current Sense", Height - Seated (Max)="0.022\" (0.55mm)", LastUpdated="2026-04-05 8:11:26 PM", Lifecycle Status=Active, Minimum Order=1, Number of Terminations=2, Package / Case="0805 (2012 Metric)", Packaging=TapeAndReel, Part Number=TLRZ2ATTD, Part Status=Active, PartId=27685, Price=0.08, Series=TLRZ, Size / Dimension="0.079\" L x 0.049\" W (2.00mm x 1.25mm)", Supplier 1=DigiKey
R3 R6 R7 R8 R9: library part CPF0603B10KE, "RES SMD 10K OHM 0.1% 1/16W 0603", Device Package="0603 (1608 Metric)", Manufacturer="TE Connectivity Passive Product", Operating Temperature="-55°C ~ 155°C", Power (Watts)="0.063W, 1/16W", Resistance="10 kOhms", Supplier Device Package=0603, Supplier Part Number 1=A119886CT-ND, Temperature Coefficient=±25ppm/°C, Tolerance=±0.1%, ComponentLink1Description=Datasheet, ComponentLink1URL=https://www.te.com/commerce/DocumentDelivery/DDEController?Action=srchrtrv&DocNm=1773200&DocType=DS&DocLang=English, ComponentLink2Description="DigiKey Link", ComponentLink2URL=https://www.digikey.com/en/products/detail/te-connectivity-passive-product/CPF0603B10KE/2389826, Composition="Thin Film", Height - Seated (Max)="0.022\" (0.55mm)", LastUpdated="2024-02-09 8:43:37 PM", Lifecycle Status=Active, Minimum Order=1, Number of Terminations=2, Package / Case="0603 (1608 Metric)", Packaging=TapeAndReel, Part Number=CPF0603B10KE, Part Status=Active, PartId=4872, Price=0.09, Series="CPF, Neohm", Size / Dimension="0.061\" L x 0.031\" W (1.55mm x 0.80mm)", Supplier 1=DigiKey
R4 R5: library part RMCF0603FT5R10, "RES 5.1 OHM 1% 1/10W 0603", Device Package="0603 (1608 Metric)", Manufacturer="Stackpole Electronics Inc", Operating Temperature="-55°C ~ 155°C", Power (Watts)="0.1W, 1/10W", Ratings=AEC-Q200, Resistance="5.1 Ohms", Supplier Device Package=0603, Supplier Part Number 1=RMCF0603FT5R10CT-ND, Temperature Coefficient=±200ppm/°C, Tolerance=±1%, ComponentLink1Description=Datasheet, ComponentLink1URL=https://www.seielect.com/catalog/sei-rmcf_rmcp.pdf, ComponentLink2Description="DigiKey Link", ComponentLink2URL=https://www.digikey.com/en/products/detail/stackpole-electronics-inc/RMCF0603FT5R10/1761181, Composition="Thick Film", Features="Automotive AEC-Q200", Height - Seated (Max)="0.022\" (0.55mm)", LastUpdated="2024-02-09 8:43:31 PM", Lifecycle Status=Active, Minimum Order=1, Number of Terminations=2, Package / Case="0603 (1608 Metric)", Packaging=CutTape, Part Number=RMCF0603FT5R10, Part Status=Active, PartId=6203, Price=0.01, Series=RMCF, Size / Dimension="0.061\" L x 0.031\" W (1.55mm x 0.80mm)", Supplier 1=DigiKey
R10 R11 R12: library part CRCW06031K00FKEB, "RES SMD 1K OHM 1% 1/10W 0603", Device Package="0603 (1608 Metric)", Manufacturer="Vishay Dale", Operating Temperature="-55°C ~ 155°C", Power (Watts)="0.1W, 1/10W", Ratings=AEC-Q200, Resistance="1 kOhms", Supplier Device Package=0603, Supplier Part Number 1=541-2985-1-ND, Temperature Coefficient=±100ppm/°C, Tolerance=±1%, ComponentLink1Description=Datasheet, ComponentLink1URL=http://www.vishay.com/docs/20035/dcrcwe3.pdf, ComponentLink2Description="DigiKey Link", ComponentLink2URL=https://www.digikey.com/en/products/detail/vishay-dale/CRCW06031K00FKEB/5071169, Composition="Thick Film", Features="Automotive AEC-Q200", Height - Seated (Max)="0.020\" (0.50mm)", LastUpdated="2024-02-09 8:43:36 PM", Lifecycle Status=Active, Minimum Order=1, Number of Terminations=2, Package / Case="0603 (1608 Metric)", Packaging=CutTape, Part Number=CRCW06031K00FKEB, Part Status=Active, PartId=5123, Price=0.01, Series=CRCW, Size / Dimension="0.063\" L x 0.033\" W (1.60mm x 0.85mm)", Supplier 1=DigiKey
TP1 TP2 TP3 TP4 TP5 TP6 TP7: library part "TP SMT Compact", "Test-Point SMT Compact", Manufacturer Part #=5016, BTI Part #=113190062, Install/No Install=Install
TS1: library part donut_button
TS2: library part circle_button
TS3: library part square_button
TS4: library part q_touch_slider
U1: library part CMP-12756-000043-1, "IC REG LINEAR 3.3V 1A SOT223", Case/Package=TO-261-4, Dropout Voltage=1.2V, Max Operating Temperature=125°C, Min Current Limit=1A, Min Operating Temperature=-40°C, Output Current=800mA, Output Voltage=3.3V, Mount="Surface Mount", Number of Pins=3, Number of Regulators=1, Packaging="Tape and Reel", RoHS Compliant=Yes
U2: library part CMP-06284-000011-1, "IC USB TO I2C/UART 14SOIC", Ambient Temperature Range High=+85°C, Ambient Temperature Range Low=-40°C, Manufacturer=Microchip, Max Junction Temp=+150°C, Max Supply Voltage=5.5V, Min Supply Voltage=3V, Nominal Supply Current=10-13mA, Package=C04-065-SL, Temperature="-40°C to +85°C", Automotive=Yes, Automotive Grade="Grade 3", Category=IC, ComponentLink2Description=Datasheet, ComponentLink2URL=http://ww1.microchip.com/downloads/en/DeviceDoc/20005565B.pdf, Data Rate=12Mbits/s, Device Class L1="Integrated Circuits (ICs)", Device Class L2="Interface ICs", Device Class L3="USB Interface ICs", Digikey Description="IC USB TO I2C/UART 14SOIC", Footprint Url=http://ww1.microchip.com/downloads/en/DeviceDoc/14L%20SOIC%203_90%20mm%20%28SL%29%20C04-00065d.pdf, Height=1.75mm, Interface=I2C,UART,USB, Ipc Land Pattern Name=SOIC127P600X175-14, Lead Free=Yes, Manufacturer Part Number=MCP2221A-I/SL, Octopart=https://octopart.com/mcp2221a-i%2Fsl-microchip-71704986, RoHS=TRUE, Standoff Height=0.1mm, Temperature Range High=+85°C, Temperature Range Low=-40°C, Usb Standard="USB 2.0"
U3: "ARMÂ® CortexÂ®-M0+ STM32C0 Microcontroller IC 32-Bit 48MHz 16KB (16K x 8) FLASH 20-TSSOP", Package=None, Check_prices=https://www.snapeda.com/parts/STM32C011F4P6TR/STMicroelectronics/view-part/?ref=eda, MF=STMicroelectronics, MP=STM32C011F4P6TR, SnapEDA_Link=https://www.snapeda.com/parts/STM32C011F4P6TR/STMicroelectronics/view-part/?ref=snap
U4: library part CMP-06270-000017-1, "IC TOUCH SENSOR CAP 6CH 10DFN", Case/Package=DFN, Max Operating Temperature=125°C, Max Supply Voltage=5.5V, Min Operating Temperature=-40°C, Min Supply Voltage=3V, Nominal Supply Current=500uA, Operating Supply Voltage=5V, Package Quantity=5000, Interface=I2C, Length=3mm, Mount="Surface Mount", Number of Channels=6, Number of Inputs=6, Number of Pins=10, Operating Supply Current=500uA, Packaging="Tape and Reel", Reach SVHC Compliant=Yes, RoHS Compliant=Yes, Series=-, Supply Current=500uA, Termination=SMD/SMT, Touchscreen=Capacitive, Width=3mm

## Free pads (board coordinates)
  round 175 hole 125 mask+0: 7(2600,200) 7(2600,3800) 7(4900,200) 7(4900,3800)

## Via types
v1: diameter 24, hole 10, Top Layer to Bottom Layer, tented both sides, 69 vias
v2: diameter 25, hole 10, Top Layer to Bottom Layer, tented both sides, 18 vias
v3: diameter 19.68, hole 11.81, Top Layer to Bottom Layer, tented top, 6 vias

## Nets (pads, with @x,y where several pads share a name; then routed paths per layer and width w, separated by ;. In a path a pad name is that pad's centre, name@x,y a point inside that pad or via, vN(x,y) a via of type N, cw(c..) or ccw(c..) an arc to the next point about the centre after c; other vN are vias at no path point)
+3V3: C5.2 C8.2 C9.2 J2.1 R3.2 R6.2 R7.2 R8.2 R9.2 TP2.1 U1.2 U1.4 U3.4 U4.5 | length 3620.4
  Top Layer w10: v2(1180,1630) 1185.59,1635.59 R7.2 1180,1685.59 U4.5
  Top Layer w15: U3.4 C9.2@1092.99,1381.61
  Top Layer w20: R6.2@420,1650 v2(480,1650) ; R9.2 944.41,1621.97 937.68,1628.7 935.71,1628.7 921.85,1642.56 921.85,1739.97 R3.2 918.25,1749.84 949.84,1749.84 1000,1800 v2(1000,1875) ; R8.2 1100,1910.59 v2(1100,1975) 1100,2325
  Bottom Layer w10: 1100,1650 1120,1630 v2(1180,1630)
  Bottom Layer w20: J2.1 140,1160 50,1250 50,1575 125,1650 v2(480,1650) 480,1705 500,1725 950,1725 975,1750 975,1850 v2(1000,1875) v2(1100,1975) 1100,1650 1050,1600 v2(1050,1380)
+5V: C2.2 C3.2 C4.2 FB1.2 TP1.1 U1.3 U2.1 | length 1196.3
  Top Layer w20: FB1.2 436.57,2606.57 578.35,2748.35 TP1.1@590.18,2748.35 ; U2.1 726.93,2126.7 840,2239.78 840,2377.83 846.62,2384.45 U1.3
  Top Layer w30: FB1.2 C3.2 C2.2 720,2375 729.45,2384.45 U1.3
+VUSB: C1.2 D1.2 D2.2 FB1.1 J1.A4 J1.A9 J1.B4 J1.B9 | length 447.8
  Top Layer w20: 180,2115 180,2267.38 193.84,2281.22 D1.2@197.44,2281.22 ; D1.2@195.23,2291.73 190,2296.97 190,2363.7 D2.2 ; FB1.1@382.13,2373.7 FB1.1
  Top Layer w30: D2.2 FB1.1@382.13,2373.7
d_n: J1.A7 J1.B7 U2.12 | length 1029.8
  Top Layer w14: v1@208.79,2035 213.95,2029.84 J1.B7
  Top Layer w15: v1(205,2035) 208.68,2035 v1@208.79,2035
  Top Layer w18.8: J1.A7@301.41,2000.93 359.07,2000.93 v1(360,2000) ; v1(800,2030) 810,2040 888.83,2040 902.12,2026.7 U2.12
  Bottom Layer w18.8: v1(205,2035) 201.9,2031.9 174.49,2031.9 163.48,2042.91 163.48,2058.48 182.62,2077.62 205,2100 256.2,2100 286.2,2070 286.2,2042.04 320.14,2008.1 350.49,2008.1 358.59,2000 v1(360,2000) 361.41,2000 369.51,2008.1 417.45,2008.1 447.45,2038.1 790.49,2038.1 798.59,2030 v1(800,2030)
d_p: J1.A6 J1.B6 U2.13 | length 1106.9
  Top Layer w14: v1@208.79,2005 213.95,2010.16 J1.B6
  Top Layer w15: v1(205,2005) v1@208.79,2005
  Top Layer w18.8: J1.A6@301.41,2039.07 359.07,2039.07 v1(360,2040) ; v1(800,2070) 801.41,2070 807.61,2063.8 889.22,2063.8 902.12,2076.7 U2.13
  Bottom Layer w18.8: v1(205,2005) 201.32,2005 198.22,2008.1 164.63,2008.1 139.68,2033.05 139.68,2068.33 172.77,2101.42 195.14,2123.8 266.06,2123.8 310,2079.86 310,2051.9 330,2031.9 350.49,2031.9 358.59,2040 v1(360,2040) 361.41,2040 369.51,2031.9 407.59,2031.9 437.59,2061.9 790.49,2061.9 798.59,2070 v1(800,2070)
GND: C1.1 C2.1 C3.1 C4.1 C5.1 C6.1 C7.1 C8.1 C9.1 D1.1 D2.1 J1.A1 J1.A12 J1.B1 J1.B12 J1.S J2.4 R4.1 R5.1 R10.1 R11.1 R12.1 TP7.1 U1.1 U2.14 U3.5 U4.11 | length 367.7
  Top Layer w10: D1.1 379.41,2285 R5.1 ; J1.B1 253.15,1901.89 276.97,1901.89 ; J1.B12 253.54,2138.11 277.17,2138.11 ; J1.S@284.65,1849.92 276.97,1857.6 276.97,1901.89 ; J1.S@284.65,2190.08 277.17,2182.6 277.17,2138.11 ; J1.A12 276.97,1901.89 ; J1.A1 277.17,2138.11
  other v1: 50,1100 200,1100 350,1100 650,1100 1250,1100 1550,1100 1700,1100 1850,1100 425,1250 575,1250 875,1250 1025,1250 1175,1250 1325,1250 1475,1250 1625,1250 1775,1250 1925,1250 350,1400 1400,1400 1550,1400 1700,1400 1850,1400 1325,1550 1475,1550 1625,1550 1775,1550 1925,1550 50,1700 200,1700 350,1700 1250,1700 1400,1700 1550,1700 1700,1700 1850,1700 575,1850 50,2000 500,2000 1400,2000 1550,2000 575,2150 1025,2150 1175,2150 1325,2150 1775,2150 1925,2150 295,2285 50,2300 500,2300 650,2300 800,2300 125,2450 50,2600 200,2600 350,2600 500,2600 650,2600 800,2600 950,2600 425,2750 725,2750 875,2750
  other v3: 1214.25,1763.94 1257.56,1763.94 1214.25,1799.37 1257.56,1799.37 1214.25,1834.8 1257.56,1834.8
NetC6_2: C6.2 U2.11 | length 92.3
  Top Layer w10: U2.11 967.67,1976.7 C6.2@999.84,2008.87
NetD3_2: D3.2 R10.2 | length 74.9
  Top Layer w20: R10.2 D3.2
NetD4_2: D4.2 R11.2 | length 78.8
  Top Layer w10: R11.2 D4.2
NetD5_2: D5.2 R12.2 | length 78.3
  Top Layer w10: R12.2@621.06,2175.47 624.52,2178.93 R12.2
  Top Layer w15: D5.2 R12.2@624.52,2178.93
NetJ1_A5: J1.A5 R5.2 | length 235.7
  Top Layer w10: J1.A5@301.18,2059.84 349.84,2059.84 375,2085 375,2229.41 R5.2
NetJ1_B5: J1.B5 R4.2 | length 271.1
  Top Layer w10: R4.2 174.41,1931.41 232.57,1989.57 248.7,1989.57 J1.B5
NetR1_1: R1.1 U2.6 | length 418.4
  Top Layer w15: R1.1 550.14,1614.59 569.59,1614.59 765,1810 765,1835 731.24,1868.76 731.24,1872.39 726.93,1876.7 U2.6
NetR2_2: R2.2 U2.5 | length 768.9
  Top Layer w15: U2.5 712.54,1922.39 733.84,1922.39 805,1851.23 805,1760 745.55,1700.55 R2.2
NetR13_1: R13.1 U4.1 | length 507.6
  Top Layer w10: U4.1 1182.44,1838.74 1182.91,1839.21 1182.91,1912.91 1420,2150 R13.1
NetR13_2: R13.2 TS3.1 | length 2474.7
  Top Layer w10: R13.2 1640,2150 1885,2395 2395,2395 TS3.1
NetR14_1: R14.1 U4.10 | length 313.6
  Top Layer w10: U4.10 1292.01,1838.94 1305.82,1838.94 1495.31,2028.43 1497.91,2028.43 1515.55,2046.06 R14.1
NetR14_2: R14.2 TS1.1 | length 2845.2
  Top Layer w10: R14.2 2317,2050 2586,2319 4075,2319 4247,2147
NetR15_1: R15.1 U4.9 | length 278
  Top Layer w10: U4.9 1344.06,1819.06 1475,1950 R15.1
NetR15_2: R15.2 TS2.1 | length 1336.3
  Top Layer w10: R15.2 2850,1950 TS2.1
NetR16_1: R16.1 U4.8 | length 245.6
  Top Layer w10: U4.8 U4.8@1300.16,1799.37 ; U4.8@1300.79,1800 U4.8@1300.16,1799.37 ; R16.1 1470,1850 1419.37,1799.37 U4.8@1300.16,1799.37
NetR16_2: R16.2 TS4.3 | length 2612
  Top Layer w10: R16.2 2310,1850 3415.36,744.64 3415.36,689.64 TS4.3
NetR17_1: R17.1 U4.7 | length 236
  Top Layer w10: U4.7 1385.31,1779.69 1415,1750 R17.1
NetR17_2: R17.2 TS4.2 | length 2168.5
  Top Layer w10: R17.2 2010,1750 3014.64,745.36 3014.64,685.36 TS4.2
NetR18_1: R18.1 U4.6 | length 269.3
  Top Layer w10: U4.6 1299.6,1760 1409.6,1650 R18.1
NetR18_2: R18.2 TS4.1 | length 3365.2
  Top Layer w10: R18.2 1950,1650 2854.64,745.36 2854.64,400.57 2980,275.2 2980,240 3010,210 3790,210 3820,240 3820,270.2 3912,362.2 TS4.1@3912,500
rx_led: D5.1 U2.2 | length 95.9
  Top Layer w10: D5.1 632.85,2055.5 648.91,2055.5 663.29,2069.89 701.41,2069.89 U2.2
stm_alert: R8.1 U3.11 U4.2 | length 789
  Top Layer w10: U3.11 666.61,1651.61 v2(670,1655) ; v2(1035,1790) 1035,1794.41 1081.3,1840.71 1081.3,1842.68 1093.03,1854.41 R8.1 1096.97,1854.41 1108.7,1842.68 1108.7,1840.71 1130.35,1819.06 U4.2
  Bottom Layer w10: v2(670,1655) 995,1655 1035,1695 v2(1035,1790)
stm_led: D3.1 U3.7 | length 444.5
  Top Layer w10: U3.7 943.39,1458.39 1035,1550 v2(1100,1550) ; D3.1@1250,1500.06 v2(1250,1550)
  Bottom Layer w10: v2(1100,1550) v2(1250,1550)
stm_rst: C7.2 J2.5 R6.1 U3.6 | length 880.6
  Top Layer w10: J2.5 334.14,1560 420,1560 ; C7.2@420,1509.1 C7.2 420,1560 ; R6.1@420,1602.15 420,1560 ; v2(470,1560) 420,1560 ; v2(820,1462.5) 820,1460 847.2,1432.8 U3.6
  Bottom Layer w10: v2(470,1560) 720,1560 817.5,1462.5 v2(820,1462.5)
stm_scl: R7.1 TP4.1 U3.20 U4.4 | length 1547.8
  Top Layer w10: v2(595,1290) 609.84,1304.84 U3.20 ; v2(965,1440) 1080,1440 1135,1495 ; U4.4 1144.69,1779.69 1130,1765 1130,1684.41 R7.1 1135,1679.41 1135,1495 ; TP4.1@1380,1085 1370.56,1085 1310.25,1145.31 1310.25,1179.75 1180,1310 1170,1320 1170,1460 1135,1495
  Bottom Layer w10: v2(595,1290) 715,1410 935,1410 v2(965,1440)
stm_sda: R9.1 TP3.1 U3.1 U4.3 | length 951.3
  Top Layer w10: U3.1 916.02,1304.84 919.09,1301.77 919.09,1300.91 957.13,1262.87 962.13,1262.87 v2(965,1260) 965,1160 TP3.1 ; v2(995,1555) 995,1620 R9.1@995,1635 ; R9.1 995.59,1635 995.59,1670.59 1124.37,1799.37 U4.3
  Bottom Layer w10: v2(965,1260) 995,1290 v2(995,1555)
stm_uart1_rx: R1.2 TP5.1 U3.15 | length 583.5
  Top Layer w10: TP5.1 500,1135 v2(500,1240)
  Top Layer w15: R1.2 535,1495 v2(580,1450) 597.2,1432.8 U3.15
  Bottom Layer w15: v2(500,1240) 500,1370 v2(580,1450)
stm_uart1_tx: R2.1 TP6.1 U3.2 | length 304.2
  Top Layer w10: TP6.1 815,1155 815,1234.45 R2.1
  Top Layer w15: R2.1 814.45,1294.45 850.43,1330.43 U3.2
swclk: J2.3 U3.19 | length 519.2
  Top Layer w10: J2.3 340,1360 370,1330 666.18,1330 U3.19
swdio: J2.2 U3.18 | length 549.7
  Top Layer w10: v2(440,1360) 443.98,1356.02 U3.18
  Bottom Layer w10: J2.2 290,1260 390,1360 v2(440,1360)
tx_led: D4.1 U2.3 | length 108.9
  Top Layer w10: D4.1 678.66,2019.89 701.41,2019.89 U2.3
usb_rst: R3.1 U2.4 U3.8 | length 630.2
  Top Layer w10: U2.4 712.46,1972.47 747.53,1972.47 840,1880 840,1770.64 850.23,1760.4 852.2,1760.4 863.93,1748.67 R3.1 ; R3.1@863.93,1744.73 852.2,1733 850.23,1733 842.23,1725 842.23,1497.77 855.3,1484.7 892.66,1484.7 U3.8
usb_status: U2.7
pads on no net: J1.A2 J1.A3 J1.A8 J1.A10 J1.A11 J1.B2 J1.B3 J1.B8 J1.B10 J1.B11 U2.8 U2.9 U2.10 U3.3 U3.9 U3.10 U3.12 U3.13 U3.14 U3.16 U3.17

## Polygon pours and split planes (outlines as drawn)
GND on Top Layer "GND_L01_P003" (solid, pour order 3): 25,2875 2000,2875 2000,1025 25,1025
+VUSB on Top Layer "+VUSB_L01_P001" (solid, pour order 1): 450,1800 450,2340 420,2340 420,2390 410,2400 160,2400 160,1800
+3V3 on Top Layer "+3V3_L01_P000" (solid, pour order 0): 800,2525 1015,2525 1015,2775 1500,2775 1500,2275 950,2275 950,2425 800,2425
GND on Bottom Layer "GND_L02_P002" (solid, pour order 2): 25,2875 2000,2875 2000,1025 25,1025

## Other copper
Top Layer:
  pour cut-out: 1655,1060 1960,1060 1960,1025 1655,1025
  text "MCCULLAGH 1" at 1665,1030.48 h40
Bottom Layer:
  pour cut-out: 1655,1060 1960,1060 1960,1025 1655,1025
  text "MCCULLAGH" at 1890,1030.48 h40
  text "2" at 1926.4,1030 h40

## Silkscreen, mask and mechanical layers (free items; w line width, h text height)
Top Overlay:
  lines w15: 2000,1000 2000,2900
  text "GND" at 143,2840.72 h60
  text "+5V" at 552.6,2840.72 h60
  text "+3V3" at 1273.84,2770.72 h60
  text "Capacitive Touch Sensor" at 3292.02,2737.76 h100
  text "Version 1" at 3669.71,2659.49 h80
  text "Designed By Hunter McCullagh" at 3429.06,2601.32 h60
  text "RX" at 449.76,2060 h60
  text "TX" at 451.37,1915 h60
  text "RST" at 295.9,1550.48 h40
  text "GND" at 292,1450.48 h40
  text "SWCLK" at 285.08,1340.48 h40
  text "SWDIO" at 290.73,1250.48 h40
  text "SDA" at 964.42,1180.72 h60
  text "SCL" at 1328.08,1180.72 h60
  text "+3V3" at 289.23,1170.48 h40
  text "RX" at 294.76,1080 h60
  text "TX" at 596.37,1080 h60
Board Outline:
  lines w10: 0,1000 2340,1000 2400,1000 2400,940 2400,0 5100,0 5100,4000 2400,4000 2400,2960 2400,2900 2340,2900 0,2900 0,1000
Stiffener:
  lines w10: 0,1000 2000,1000 2000,2900 0,2900 0,1000
  text "FR4 Stiffened Section" at 452.22,2001.44 h120